# Altium PCB InvertingOpAmp.PcbDoc
Units mil, origin at the board's own origin, x right, y up, seen from the top; angles counter-clockwise.
Board outline 1200 x 1200 mil, 2 copper layers (Top Layer, Bottom Layer); 6 components, 6 nets, 21 pads, 1 vias.
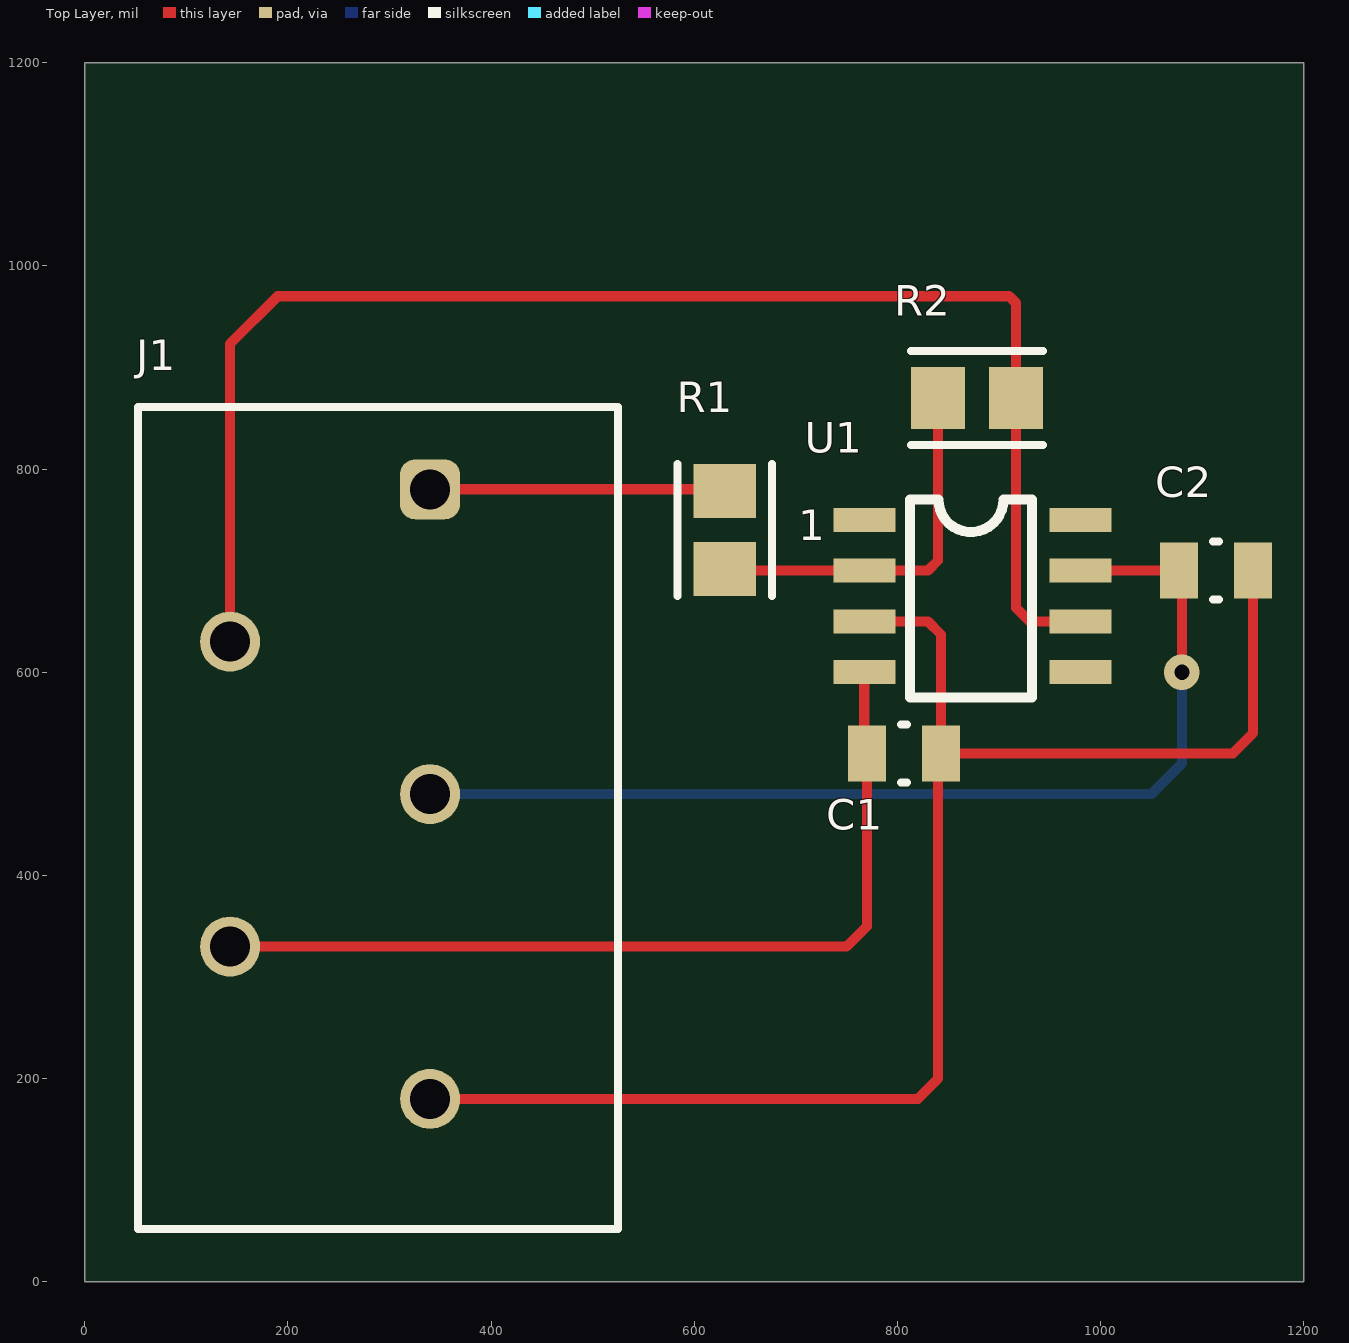
[diagram p0: Top Layer view]
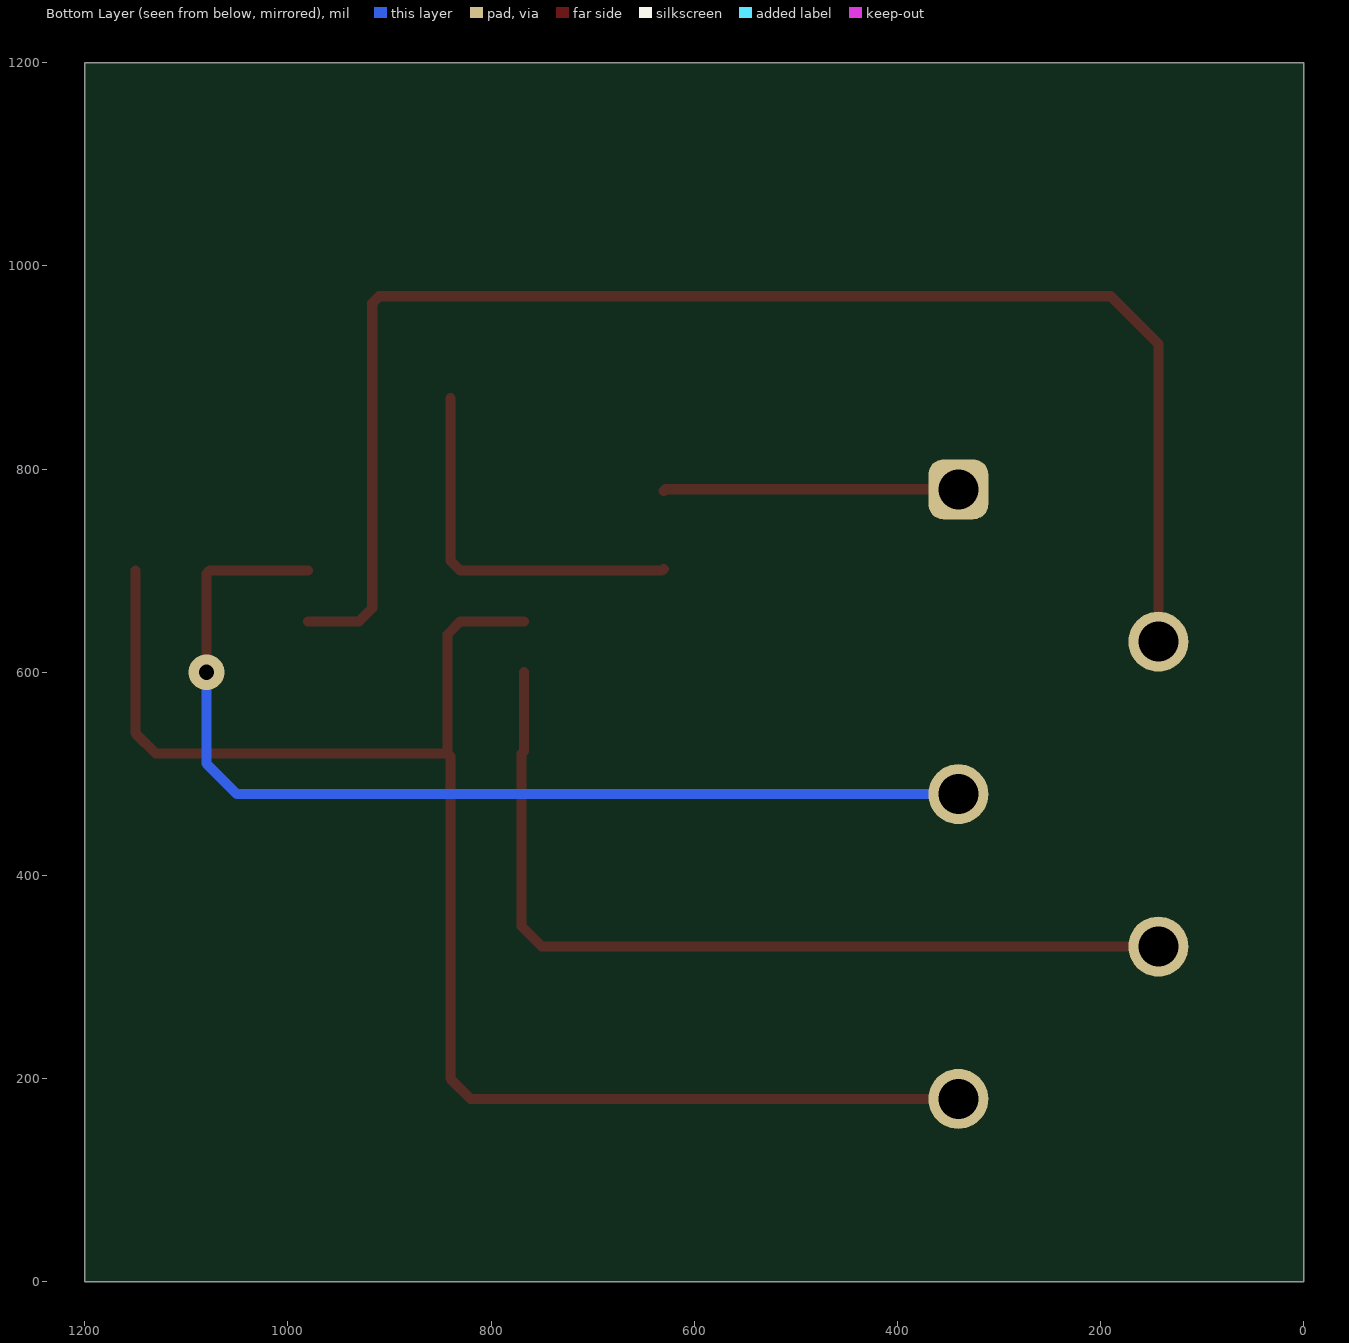
[diagram p1: Bottom Layer view, seen from below]
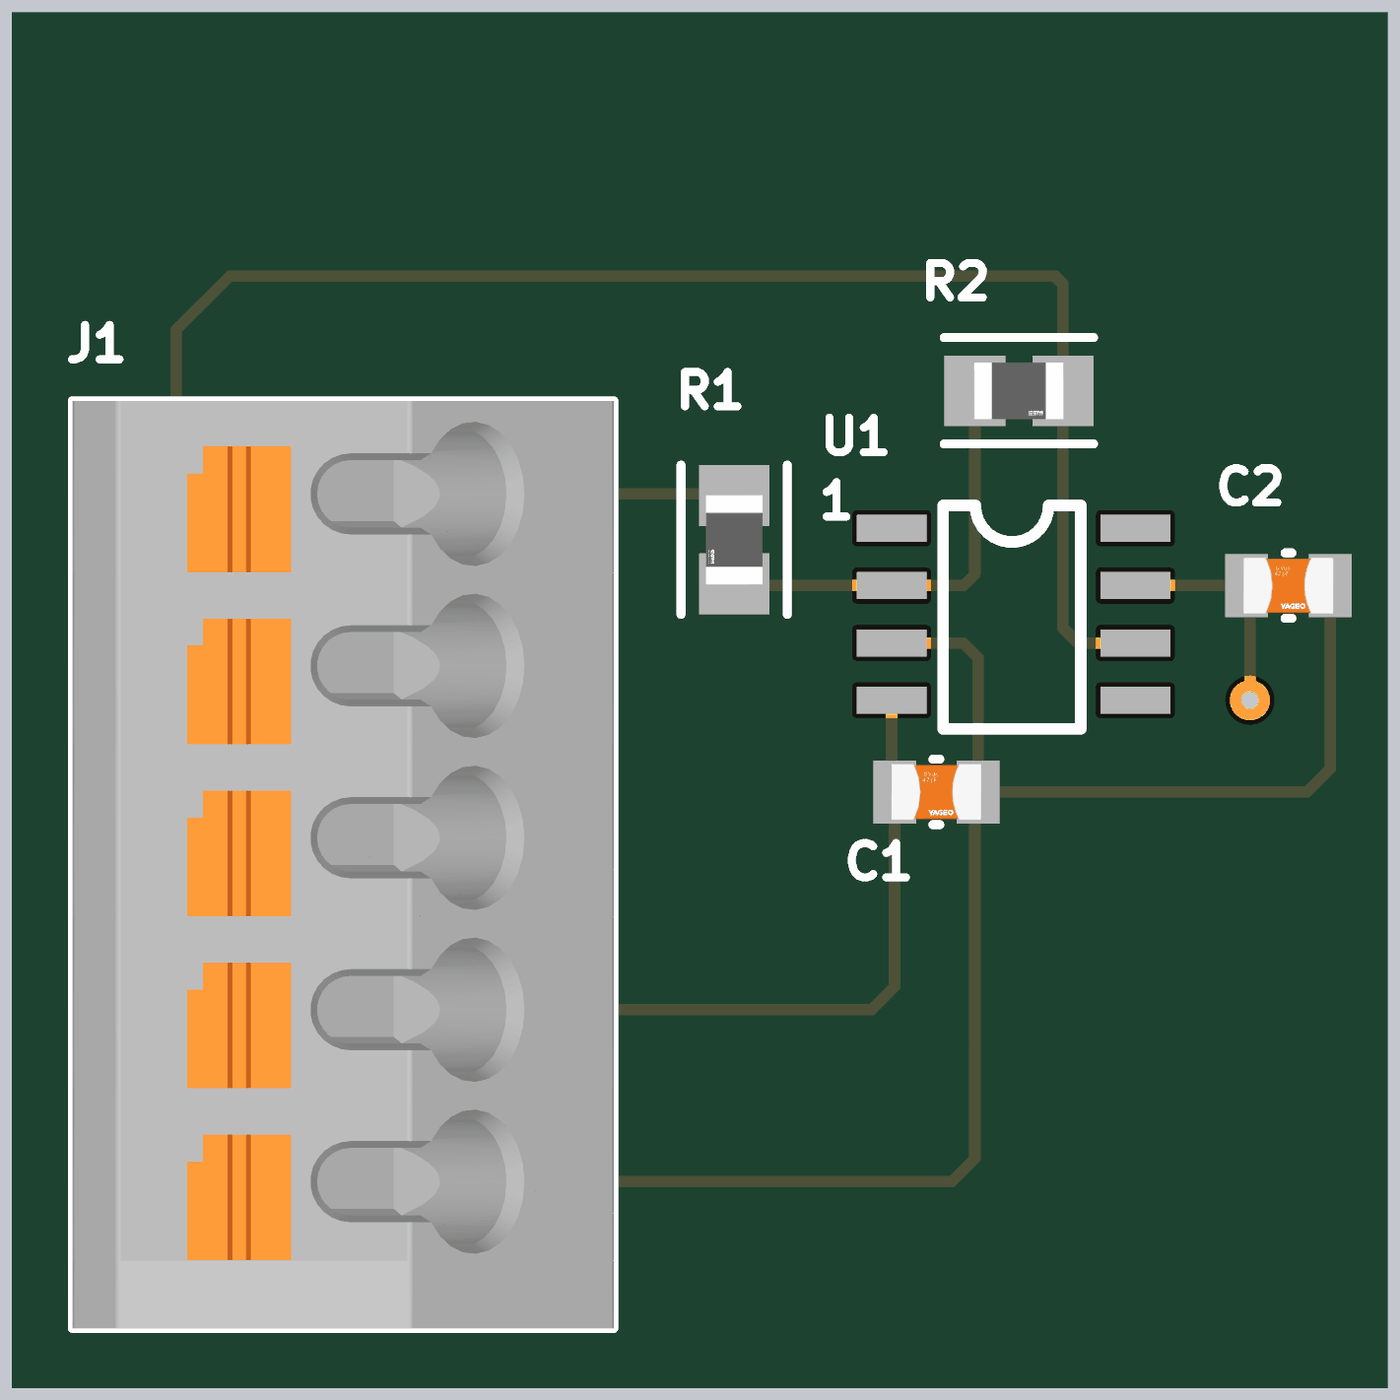
[diagram p2: 3D render of the assembled board from above, using the file's embedded part models]

## Layer stack, top to bottom
Top Solder: solder mask 0.4, Solder Resist, Dk 3.5
Top Layer: signal copper 1.4
Dielectric 1: dielectric 12.6, FR-4, Dk 4.8
Bottom Layer: signal copper 1.4
Bottom Solder: solder mask 0.4, Solder Resist, Dk 3.5

## Board outline
0,0 0,1200 1200,1200 1200,0

## Design rules (kind name [scope] priority, off if disabled: settings)
Clearance [All] p1: gap=5 ignorepadtopadclearanceinfootprint=FALSE
MinimumSolderMaskSliver [All] p1: minsoldermaskwidth=5
PolygonConnect [All] p1: connectstyle=Relief reliefconductorwidth=10 reliefentries=4 polygonreliefangle="90 Angle" airgapwidth=10
RoutingVias [All] p1: holewidth=15 width=35 viastyle="Through Hole" minholewidth=10 minwidth=30 maxholewidth=100 maxwidth=250
SilkToSilkClearance [All] p1: silktosilkclearance=5
SilkToSolderMaskClearance [IsPad] p1: minsilkscreentomaskgap=7.5 clearancetoexposedcopper=TRUE
SolderMaskExpansion [All] p1: expansion=4 istentingtop=FALSE
SupplyNets "Schematic Supply Nets_2" [InNet('GND')] p1: voltage=0.000
SupplyNets "Schematic Supply Nets_1" [InNet('-12V0')] p2: voltage=0.000
SupplyNets "Schematic Supply Nets" [InNet('12V0')] p3: voltage=0.000
Width [All] p1: maxlimit=1000 minlimit=5 preferedwidth=10
27 further rules are at their usual default settings.

## Components (designator, comment, footprint, x,y, rotation, side; value= is the part's Value field where it differs from the comment)
C1 "CC0805KRX7R9BB104" FP-CC0805-0_85-MFG 806.42,520 r0 top value="100 nF"
C2 "CC0805KRX7R9BB104" FP-CC0805-0_85-MFG 1113.58,700 r0 top value="100 nF"
J1 "691412320005" 691412320005 288.82,456.57 r90 top
R1 "RR1220P-103-D" FP-RR1220-IPC_A 630,740 r270 top
R2 "RR1220P-103-D" FP-RR1220-IPC_A 878.41,870 r0 top
U1 "TL061CDR" SOIC8 767.4,750 r0 top

## Footprints (in the part's own frame and the unit in brackets; to place one, negate y for a bottom-side part, rotate by r counter-clockwise, add the part's x,y. Pads: shape width x height; smd on the part's side, far side on the other; paste and mask are expansions set on the pad)
691412320005 [mm] "3.81mm 45¡ã Cable Entry Screwless, 5p"
  rrect50% 1.5x1.5 hole 1: 1(8.215,-1.3)
  round 1.5 hole 1: 2(4.405,3.7) 3(0.595,-1.3) 4(-3.215,3.7) 5(-7.025,-1.3)
  silkscreen extent -10.28,-6 10.28,6, body extent -10.28,-6 10.28,6, height 13.28
FP-CC0805-0_85-MFG [mm]
  rect 0.95x1.4 smd paste+0 mask+0: 1(-0.925,0) 2(0.925,0)
  silkscreen extent -0.08,-0.72 0.08,0.72, body extent -1.6,-1.05 1.6,1.05, height 0.25
FP-RR1220-IPC_A [mil]
  rect 53.34x61.27 smd paste+0 mask+0: 1(-38.41,0) 2(38.41,0)
  silkscreen extent -65,-46 65,46, body extent -85,-50 85,50, height 10
SOIC8 [mm]
  rect 1.55x0.6 smd: 1(0,0) 2(0,-1.27) 3(0,-2.54) 4(0,-3.81) 5(5.4,-3.81) 6(5.4,-2.54) 7(5.4,-1.27) 8(5.4,0)
  silkscreen extent 1.14,-4.44 4.19,0.51

## Part data
C1 C2: library part CMP-2100-03606-3, "CAP CER 0.1UF 50V X7R 0805", Capacitance="100 nF", Manufacturer=Yageo, Package=CC0805-0.85, Temperature="-30°C to +85°C", Temperature Characteristic=X7R, Temperature Range High=+85°C, Temperature Range Low=-30°C, Tolerance=0.1, Voltage Rating="50 V", Automotive=No, Category=Cap, ComponentLink2Description=Datasheet, ComponentLink2URL=http://www.yageo.com/documents/recent/UPY-GPHC_Y5V_6.3V-to-50V_8.pdf, Device Class L1="Passive Components", Device Class L2=Capacitors, Device Class L3="Ceramic Capacitors", Digikey Description="CAP CER 0.1UF 50V X7R 0805", Footprint Url=http://www.yageo.com/exep/pages/download/literatures/UPY-C_GEN_24.pdf, Height=0.95mm, Ipc Land Pattern Name=CAPC200125X85, Lead Free=Yes, Manufacturer Part Number=CC0805KRX7R9BB104, Material=Ceramic, Mouser Description="Multilayer Ceramic Capacitors MLCC - SMD/SMT 100nF 50V X7R 10%", Octopart=https://octopart.com/cc0805krx7r9bb104-yageo-192993, RoHS=TRUE
J1: library part CMP-1502-02954-2, Lead Pitch=3.81mm, NexarPartId=78871498, Number of Pins=5, Packaging=Box, RoHS=Non-Compliant
R1 R2: library part CMP-2001-03215-2, "10kΩ ±0.5% 0.1W 1/10W Chip Resistor 0805 (2012 Metric) Thin Film", Case Code (Imperial)=0805, Case Code (Metric)=2012, Max Operating Temperature=125°C, Max Power Dissipation=100mW, Min Operating Temperature=-55°C, Package Quantity=1, Resistance=10k, Resistance Tolerance=0.5%, Resistor Type="Thin Film", Temperature Coefficient=25ppm/°C, Voltage Rating=100V, Case/Package=0805, Depth=1.25mm, Height=0.4mm, Lead Free="Lead Free", Length=2mm, Number of Terminations=2, Packaging="Tape and Reel", Power Rating=100mW, RoHS Compliant=Yes, Series=RR, Size Code=0805, Technology="THIN FILM", Termination=SMD/SMT, Tolerance=0.5%, Voltage Rating (DC)=100V, Weight=0.000194oz, Width=1.25mm
U1: library part TLO61, "IC OPAMP JFET 1 CIRCUIT 8SOIC"

## Via types
v1: diameter 35, hole 15, Top Layer to Bottom Layer, 1 vias

## Nets (pads, with @x,y where several pads share a name; then routed paths per layer and width w, separated by ;. In a path a pad name is that pad's centre, name@x,y a point inside that pad or via, vN(x,y) a via of type N, cw(c..) or ccw(c..) an arc to the next point about the centre after c; other vN are vias at no path point)
12V0: C2.1 J1.3 U1.7 | length 1040.8
  Top Layer w10: U1.7 C2.1 1080,697.17 v1(1080,600)
  Bottom Layer w10: J1.3 1050,480 1080,510 v1(1080,600)
-12V0: C1.1 J1.4 U1.4 | length 886.2
  Top Layer w10: J1.4 750,330 770,350 C1.1 767.4,522.6 U1.4
GND: C1.2 C2.2 J1.5 U1.3 | length 1502.8
  Top Layer w10: J1.5 820,180 840,200 840,517.17 C1.2 ; U1.3 830,650 842.83,637.17 C1.2 ; C2.2 1150,540 1130,520 C1.2
IN: J1.1 R1.1 | length 290.7
  Top Layer w10: J1.1 628.41,780 R1.1
NetR1_2: R1.2 R2.1 U1.2 | length 374.8
  Top Layer w10: R1.2 631.59,700 U1.2 830,700 840,710 R2.1
OUT: J1.2 R2.2 U1.6 | length 1457.7
  Top Layer w10: J1.2 143.15,923.15 190,970 910,970 916.82,963.18 R2.2 916.82,663.18 930,650 U1.6
pads on no net: U1.1 U1.5 U1.8

## Silkscreen, mask and mechanical layers (free items; w line width, h text height)
Mechanical 1:
  the board outline again, w10

## Text inside footprints (layer, text, board x,y; h text height)
U1: Top Overlay "1" at 702.4,730 h30